# Altium PCB EIGHT_29.PcbDoc
Units mm, origin at the board's own origin, x right, y up, seen from the top; angles counter-clockwise.
Board outline 30 x 100 mm, 2 copper layers (Top Layer, Bottom Layer), stack 1.036 mm thick; 126 components, 109 nets, 375 pads, 86 vias.
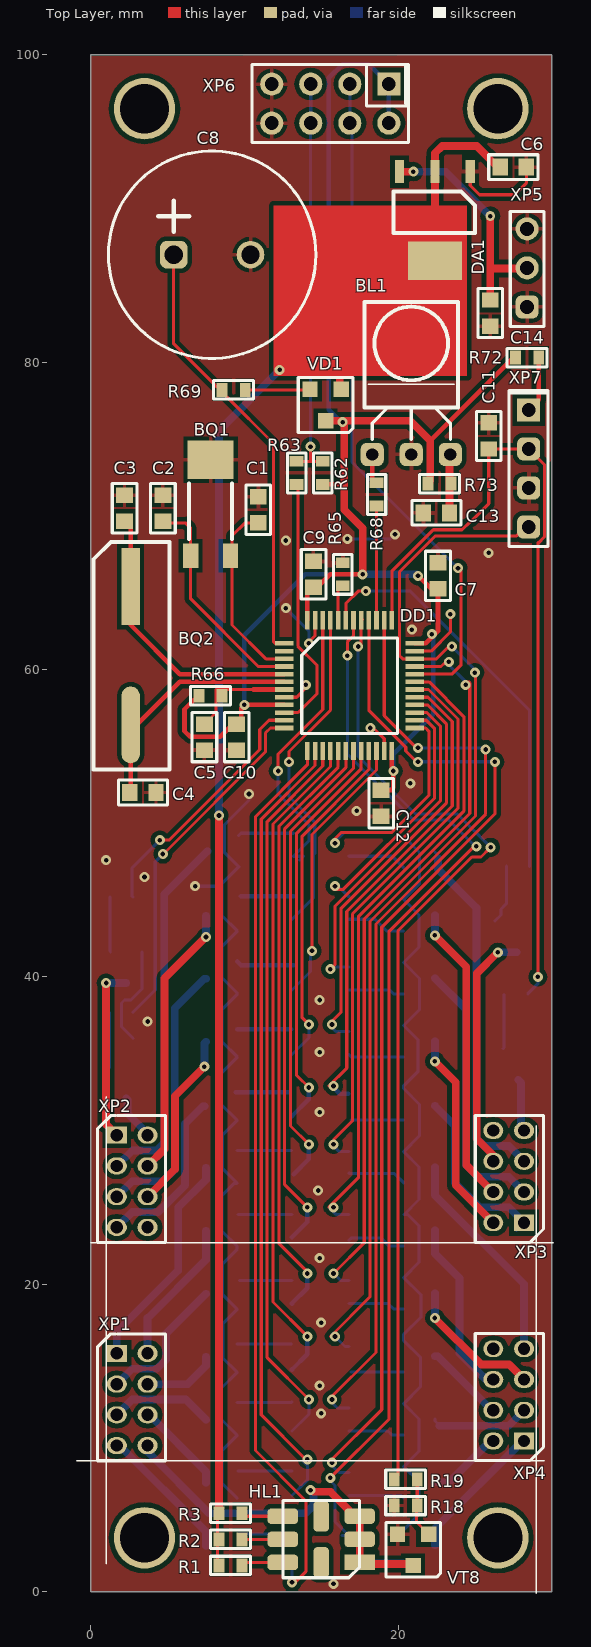
[diagram p0: Top Layer view]
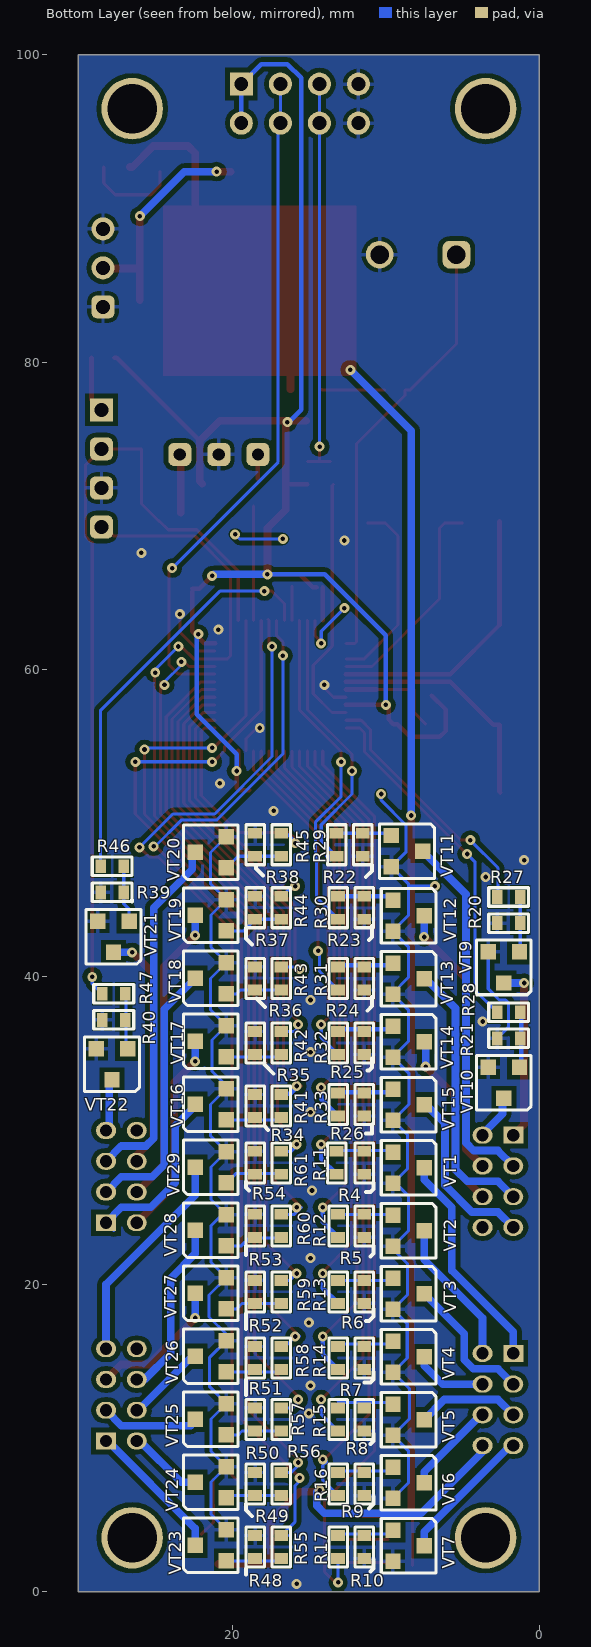
[diagram p1: Bottom Layer view, seen from below]

## Layer stack, top to bottom
Top Solder: solder mask 0.0102, Solder Resist, Dk 3.5
Top Layer: signal copper 0.018
Dielectric1: core 1, FR-4, Dk 4.8
Bottom Layer: signal copper 0.018
Bottom Solder: solder mask 0.0102, Solder Resist, Dk 3.5

## Board outline
0,0 0,100 30,100 30,0

## Design rules (kind name [scope] priority, off if disabled: settings)
Clearance Clearance_1 [IsRegion] p1: gap=0.3
Clearance [All] p2: gap=0.18
HoleSize HoleSize_1 [All] p1: absolutevalues=TRUE maxlimit=44 minlimit=0.025 maxpercent=80.000 minpercent=20.000
HoleSize [All] p2: absolutevalues=TRUE maxlimit=2.54 minlimit=0.025 maxpercent=80.000 minpercent=20.000
MinimumSolderMaskSliver [All] p1: minsoldermaskwidth=0
PlaneClearance [All] p1: clearance=0.3
PlaneConnect [All] p1: planeconnectstyle=Direct reliefexpansion=0.508 reliefentries=4 reliefconductorwidth=0.2 reliefairgap=0.2
PolygonConnect PolygonConnect_isVia [isVia] p1: connectstyle=Direct reliefconductorwidth=0.254 reliefentries=4 polygonreliefangle="90 Angle" airgapwidth=0.254
PolygonConnect [All] p2: connectstyle=Relief reliefconductorwidth=0.254 reliefentries=4 polygonreliefangle="90 Angle" airgapwidth=0.254
RoomDefinition EIGHT_29 [InComponentClass('EIGHT_29')] p1: confinementstyle=ConfineIn formatcopy=TRUE lockcomponents=FALSE outline -14,-7.2 177.7,-7.2 177.7,100.4 -14,100.4
RoutingVias [All] p1: holewidth=0.3 width=0.65 viastyle="Through Hole" minholewidth=0.3 minwidth=0.65 maxholewidth=100 maxwidth=100
SilkToSilkClearance SilkToSilkClearance_1 [All] p1: silktosilkclearance=0
SilkToSilkClearance [All] p2: silktosilkclearance=0
SilkToSolderMaskClearance [IsPad] p1: minsilkscreentomaskgap=0 clearancetoexposedcopper=TRUE
SolderMaskExpansion [All] p1: expansion=0.1
Width Width_1 [All] p1: maxlimit=0.5 minlimit=0.1 preferedwidth=0.2 minimp=50.000000 maximp=50.000000 favimp=50.000000
Width [All] p2: maxlimit=5 minlimit=0.2 preferedwidth=0.2
23 further rules are at their usual default settings.

## Components (designator, comment, footprint, x,y, rotation, side; value= is the part's Value field where it differs from the comment)
BL1 "TSOP34836" "TSOP348xx -landed" 23.4,74 r270 top
BQ1 "MS1V-T1K" Quartz32k 9.1,67.4 r270 top
BQ2 "8,000M" "HC 49SM" 2.6,65.4 r270 top
C1 "20" Cap_0805 10.9,70.4 r90 top
C2 "20" Cap_0805 4.7,70.5 r90 top
C3 "20" Cap_0805 2.2,70.5 r90 top
C4 "20" Cap_0805 3.4,52 r0 top
C5 "0,01uF" Cap_0805 7.4,55.6 r90 top
C6 "4,7uF" Cap_0805 27.5,92.7 r180 top
C7 "0.1uF" CAP_0805 22.6,66.1 r270 top
C8 "EECF5R5U224" EECF5R5U224 5.4,87 r0 top
C9 "0.1uF" CAP_0805 14.5,66.2 r270 top
C10 "0.1uF" CAP_0805 9.5,55.6 r90 top
C11 "100" Cap_0805 25.9,75.2 r270 top
C12 "0.1uF" CAP_0805 18.9,51.3 r90 top
C13 "4,7uF" Cap_0805 22.5,70.2 r0 top
C14 "0.1uF" CAP_0805 26,83.2 r90 top
DA1 "TLV1117 3.6" SOT223 22.7,89.9 r90 top
DD1 "STM32F100C8T6B" LQFP48 12.6,61.7 r0 top
HL1 "LED" LED5050 14.5,5.4 r0 top
R1 "100" Res_0603 9.1,1.7 r180 top net-tie
R2 "100" Res_0603 9.1,3.4 r180 top net-tie
R3 "100" Res_0603 9.1,5.1 r180 top net-tie
R4 "100k" Res_0603 11.4,27.9 r270 bottom net-tie
R5 "100k" Res_0603 11.4,23.8 r270 bottom net-tie
R6 "100k" Res_0603 11.4,19.5 r270 bottom net-tie
R7 "100k" Res_0603 11.4,15.2 r270 bottom net-tie
R8 "100k" Res_0603 11.4,11.2 r270 bottom net-tie
R9 "100k" Res_0603 11.4,7 r270 bottom net-tie
R10 "100k" Res_0603 11.4,2.9 r270 bottom net-tie
R11 "5.1k" Res_0603 13.2,27.9 r90 bottom net-tie
R12 "5.1k" Res_0603 13.1,23.8 r90 bottom net-tie
R13 "5.1k" Res_0603 13.1,19.5 r90 bottom net-tie
R14 "5.1k" Res_0603 13.1,15.2 r90 bottom net-tie
R15 "5.1k" Res_0603 13.1,11.2 r90 bottom net-tie
R16 "5.1k" Res_0603 13.1,7 r90 bottom net-tie
R17 "5.1k" Res_0603 13.1,2.9 r90 bottom net-tie
R18 "100k" Res_0603 20.5,5.6 r180 top net-tie
R19 "5.1k" Res_0603 20.5,7.3 r0 top net-tie
R20 "100k" Res_0603 2,43.5 r0 bottom net-tie
R21 "100k" Res_0603 2,36 r0 bottom net-tie
R22 "100k" Res_0603 11.5,48.6 r270 bottom net-tie
R23 "100k" Res_0603 11.4,44.5 r270 bottom net-tie
R24 "100k" Res_0603 11.4,39.9 r270 bottom net-tie
R25 "100k" Res_0603 11.4,35.7 r270 bottom net-tie
R26 "100k" Res_0603 11.4,31.7 r270 bottom net-tie
R27 "5.1k" Res_0603 2,45.2 r180 bottom net-tie
R28 "5.1k" Res_0603 2,37.7 r180 bottom net-tie
R29 "5.1k" Res_0603 13.2,48.6 r270 bottom net-tie
R30 "5.1k" Res_0603 13.1,44.5 r270 bottom net-tie
R31 "5.1k" Res_0603 13.1,39.9 r270 bottom net-tie
R32 "5.1k" Res_0603 13.1,35.7 r270 bottom net-tie
R33 "5.1k" Res_0603 13.1,31.7 r270 bottom net-tie
R34 "100k" Res_0603 18.5,31.6 r90 bottom net-tie
R35 "100k" Res_0603 18.5,35.7 r90 bottom net-tie
R36 "100k" Res_0603 18.5,39.9 r90 bottom net-tie
R37 "100k" Res_0603 18.5,44.5 r90 bottom net-tie
R38 "100k" Res_0603 18.5,48.6 r90 bottom net-tie
R39 "100k" Res_0603 27.8,45.5 r0 bottom net-tie
R40 "100k" Res_0603 27.7,37.2 r0 bottom net-tie
R41 "5.1k" Res_0603 16.8,31.6 r270 bottom net-tie
R42 "5.1k" Res_0603 16.8,35.7 r270 bottom net-tie
R43 "5.1k" Res_0603 16.8,39.9 r270 bottom net-tie
R44 "5.1k" Res_0603 16.8,44.5 r270 bottom net-tie
R45 "5.1k" Res_0603 16.8,48.6 r270 bottom net-tie
R46 "5.1k" Res_0603 27.8,47.2 r180 bottom net-tie
R47 "5.1k" Res_0603 27.7,38.9 r180 bottom net-tie
R48 "100k" Res_0603 18.5,2.9 r90 bottom net-tie
R49 "100k" Res_0603 18.5,7 r90 bottom net-tie
R50 "100k" Res_0603 18.5,11.2 r90 bottom net-tie
R51 "100k" Res_0603 18.5,15.2 r90 bottom net-tie
R52 "100k" Res_0603 18.5,19.5 r90 bottom net-tie
R53 "100k" Res_0603 18.5,23.8 r90 bottom net-tie
R54 "100k" Res_0603 18.5,27.9 r90 bottom net-tie
R55 "5.1k" Res_0603 16.8,2.9 r270 bottom net-tie
R56 "5.1k" Res_0603 16.8,7 r270 bottom net-tie
R57 "5.1k" Res_0603 16.8,11.2 r270 bottom net-tie
R58 "5.1k" Res_0603 16.8,15.2 r270 bottom net-tie
R59 "5.1k" Res_0603 16.8,19.5 r270 bottom net-tie
R60 "5.1k" Res_0603 16.8,23.8 r270 bottom net-tie
R61 "5.1k" Res_0603 16.8,27.9 r270 bottom net-tie
R62 "5.1k" Res_0603 15.1,72.8 r90 top net-tie
R63 "1k" Res_0603 13.4,72.8 r270 top net-tie
R65 "10k" Res_0603 16.4,66.2 r90 top net-tie
R66 "10k" Res_0603 7.8,58.3 r0 top net-tie
R68 "1k" Res_0603 18.6,71.4 r90 top net-tie
R69 "100" Res_0603 9.3,78.2 r180 top net-tie
R72 "100" Res_0603 28.4,80.3 r180 top net-tie
R73 "100" Res_0603 22.7,72.1 r180 top net-tie
VD1 "BAT54S" SOT-23 16.3,76.2 r180 top
VT1 "BC817" SOT-23 7.5,28.6 r270 bottom
VT2 "BC817" SOT-23 7.5,24.5 r270 bottom
VT3 "BC817" SOT-23 7.5,20.4 r270 bottom
VT4 "BC817" SOT-23 7.5,16.3 r270 bottom
VT5 "BC817" SOT-23 7.5,12.2 r270 bottom
VT6 "BC817" SOT-23 7.5,8.1 r270 bottom
VT7 "BC817" SOT-23 7.5,4 r270 bottom
VT8 "BC817" SOT-23 22,1.7 r180 top
VT9 "BC817" SOT-23 1.3,39.6 r0 bottom
VT10 "BC817" SOT-23 1.3,32.1 r0 bottom
VT11 "BC817" SOT-23 7.6,49.2 r270 bottom
VT12 "BC817" SOT-23 7.5,45 r270 bottom
VT13 "BC817" SOT-23 7.5,40.9 r270 bottom
VT14 "BC817" SOT-23 7.5,36.8 r270 bottom
VT15 "BC817" SOT-23 7.5,32.7 r270 bottom
VT16 "BC817" SOT-23 22.4,30.7 r90 bottom
VT17 "BC817" SOT-23 22.4,34.8 r90 bottom
VT18 "BC817" SOT-23 22.4,38.9 r90 bottom
VT19 "BC817" SOT-23 22.4,43 r90 bottom
VT20 "BC817" SOT-23 22.4,47.1 r90 bottom
VT21 "BC817" SOT-23 26.7,41.6 r0 bottom
VT22 "BC817" SOT-23 26.8,33.3 r0 bottom
VT23 "BC817" SOT-23 22.4,2 r90 bottom
VT24 "BC817" SOT-23 22.4,6.1 r90 bottom
VT25 "BC817" SOT-23 22.4,10.2 r90 bottom
VT26 "BC817" SOT-23 22.4,14.3 r90 bottom
VT27 "BC817" SOT-23 22.4,18.4 r90 bottom
VT28 "BC817" SOT-23 22.4,22.5 r90 bottom
VT29 "BC817" SOT-23 22.4,26.6 r90 bottom
XP1 "Conn_EIGHT8" CONN2-8 1.7,15.5 r0 top
XP2 "Conn_EIGHT8" CONN2-8 1.7,29.7 r0 top
XP3 "Conn_EIGHT8" CONN2-8 28.2,24 r180 top
XP4 "Conn_EIGHT8" CONN2-8 28.2,9.8 r180 top
XP5 "" CONN_2.54_3 28.4,83.6 r180 top
XP6 "Connect_2.54_8_2" LEGS8 19.4,98.1 r270 top
XP7 "SWD" CONN_2.54_4 28.5,76.9 r0 top

## Footprints (in the part's own frame and the unit in brackets; to place one, negate y for a bottom-side part, rotate by r counter-clockwise, add the part's x,y. Pads: shape width x height; smd on the part's side, far side on the other; paste and mask are expansions set on the pad)
Cap_0805 [mm]
  rect 1x1.1 smd: 1(-0.85,0) 2(0.85,0)
  silkscreen extent -1.6,-0.8 1.6,0.8
CAP_0805 [mm]
  rect 1x1.1 smd: 1(-0.85,0) 2(0.85,0)
  silkscreen extent -1.6,-0.8 1.6,0.8
CONN2-8 [mm] "BH2-8"
  rect 1.3x1.1 hole 0.8: 1(0,0)
  oval 1.3x1.1 hole 0.8: 2(2,0) 3(0,-2) 4(2,-2) 5(0,-4) 6(2,-4) 7(0,-6) 8(2,-6)
  silkscreen extent -1.27,-6.98 3.17,1.27
CONN_2.54_3 [mm]
  rrect50% 1.5x1.5 hole 0.9: 1(0,0)
  round 1.5 hole 0.9: 2(0,-2.54) 3(0,-5.08)
  silkscreen extent -1.1,-6.2 1.1,1.27
CONN_2.54_4 [mm]
  rect 1.5x1.5 hole 0.9: 1(0,0)
  rrect50% 1.5x1.5 hole 0.9: 2(0,-2.54) 3(0,-5.08) 4(0,-7.62)
  silkscreen extent -1.27,-8.89 1.27,1.27
EECF5R5U224 [mm] "EECF5R5U224 ultracapacitor"
  rrect50% 1.8x1.8 hole 1.2: 1(0,0)
  round 1.8 hole 1.2: 2(5,0)
  silkscreen extent -4.25,-6.75 9.25,6.75
"HC 49SM" [mm]
  rect 5x1.2 smd: 1(0,0)
  oval 5x1.2 smd: 2(9,0)
  silkscreen extent -2.9,-2.41 11.9,2.54
LED5050 [mm] "LED5050"
  rect 2x1 smd: 1(3,-3.5)
  rrect50% 2x1 smd: 2(3,-2) 3(3,-0.5) 4(-2,-0.5) 5(-2,-2) 6(-2,-3.5)
  rrect50% 1x2 smd: 7(0.5,-0.5) 8(0.5,-3.5)
  silkscreen extent -2,-4.5 3,0.54
LEGS8 [mm]
  rect 1.5x1.5 hole 0.9: 1(0,0)
  round 1.5 hole 0.9: 2(2.54,0) 3(0,-2.54) 4(2.54,-2.54) 5(0,-5.08) 6(2.54,-5.08) 7(0,-7.62) 8(2.54,-7.62)
  silkscreen extent -1.27,-8.9 3.81,1.27
LQFP48 [mm]
  rect 1.2x0.3 smd: 1(0,0) 2(0,-0.5) 3(0,-1) 4(0,-1.5) 5(0,-2) 6(0,-2.5) 7(0,-3) 8(0,-3.5) 9(0,-4) 10(0,-4.5) 11(0,-5) 12(0,-5.5) 25(8.5,-5.5) 26(8.5,-5) 27(8.5,-4.5) 28(8.5,-4) 29(8.5,-3.5) 30(8.5,-3) 31(8.5,-2.5) 32(8.5,-2) 33(8.5,-1.5) 34(8.5,-1) 35(8.5,-0.5) 36(8.5,0)
  rect 0.3x1.2 smd: 13(1.5,-7) 14(2,-7) 15(2.5,-7) 16(3,-7) 17(3.5,-7) 18(4,-7) 19(4.5,-7) 20(5,-7) 21(5.5,-7) 22(6,-7) 23(6.5,-7) 24(7,-7) 37(7,1.5) 38(6.5,1.5) 39(6,1.5) 40(5.5,1.5) 41(5,1.5) 42(4.5,1.5) 43(4,1.5) 44(3.5,1.5) 45(3,1.5) 46(2.5,1.5) 47(2,1.5) 48(1.5,1.5)
  silkscreen extent 1.13,-5.86 7.36,0.37
Quartz32k [mm] "Resonator 32kHz"
  rect 1.6x1 smd: 1(0,0) 2(0,-2.6)
  rect 2.5x3 smd: 3(-6.25,-1.3)
  silkscreen extent -4.7,-2.7 -1.1,0.1
Res_0603 [mm] "0603"
  rect 0.7x0.9 smd: 1(-0.75,0) 2(0.75,0)
  silkscreen extent -1.3,-0.6 1.3,0.6
SOT223 [mm] "SOT223"
  rect 1.5x0.6 smd: 1(2.5,-2) 2(2.5,0.3) 3(2.5,2.6)
  rect 2.5x3.5 smd: 4(-3.3,0.3)
  silkscreen extent -1.5,-2.3 1.2,3
SOT-23 [mm]
  rect 1x1 smd: 1(0,-2.032) 2(2.032,-2.032) 3(1.016,0)
  silkscreen extent -0.76,-2.79 2.79,0.76
"TSOP348xx -landed" [mm]
  rrect50% 1.5x1.5 hole 0.8: 1(0,-5.08) 2(0,-2.54) 3(0,0)
  silkscreen extent -9.91,-5.59 -0.98,0.51

## Part data
BL1: library part TSOP348xx_landed, "IR Receiver module"
BQ1: "MS1V-T1K Quartz 32kHz 6pF"
BQ2: library part "BQ_HC 49SM", "Crystal oscillator"
C1 C2 C3 C4: library part Cap_0805, "20pF 100V 5% NPO"
C5: library part Cap_0805, "0805 0.01uF 10V X7R 10%"
C6 C13: library part Cap_0805, "4.7uF 16V X7R 10%"
C7 C9 C10 C12 C14: library part Cap_0805
C11: library part Cap_0805, "0805 100pF 50V X7R 10%"
DA1: library part TLV1117, "TLV1117-sot223"
DD1: "ARM Cortex-M3 MCU"
HL1: library part "LED SMD5050", "SMD5050"
R1 R2 R3 R69 R72 R73: library part Res_0805, "0805 0.125W 100 Ohms 5%"
R4 R5 R6 R7 R8 R9 R10 R18 R20 R21 R22 R23 R24 R25 R26 R34 R35 R36 R37 R38 R39 R40 R48 R49 R50 R51 R52 R53 R54: library part Res_0805, "0805, 0.125W, 100 kOhm, 5 %"
R11 R12 R13 R14 R15 R16 R17 R19 R27 R28 R29 R30 R31 R32 R33 R41 R42 R43 R44 R45 R46 R47 R55 R56 R57 R58 R59 R60 R61 R62: library part Res_0805, "0805, 0.125W, 5.1 kOhm, 5 %"
R63: library part Res_0805, "0805, 0.125W, 1 kOhm, 5 %"
R65 R66: library part Res_0805, "0805, 0.125W, 10 kOhm, 5 %"
R68: library part Res_0805, "0805 1k Ohm 5% 0.125W"
VT1 VT2 VT3 VT4 VT5 VT6 VT7 VT8 VT9 VT10 VT11 VT12 VT13 VT14 VT15 VT16 VT17 VT18 VT19 VT20 VT21 VT22 VT23 VT24 VT25 VT26 VT27 VT28 VT29: library part NPN_SOT23_DIG_1, "BC817 NPN"
XP5: library part CONNECT_3
XP7: library part CONNECT_SWD, "PLS-4"

## Free pads (board coordinates)
  round 4 hole 3.2: 0(3.5,3.5) 0(3.5,96.5) 0(26.5,3.5) 0(26.5,96.5)

## Via types
v1: diameter 0.65, hole 0.3, Top Layer to Bottom Layer, 86 vias

## Nets (pads, with @x,y where several pads share a name; then routed paths per layer and width w, separated by ;. In a path a pad name is that pad's centre, name@x,y a point inside that pad or via, vN(x,y) a via of type N, cw(c..) or ccw(c..) an arc to the next point about the centre after c; other vN are vias at no path point)
+3.6V: C6.2 DA1.2 DA1.4 R1.2 R2.2 R3.2 VD1.1 | length 104.5
  Top Layer w0.2: R1.2@8.25,1.7 R3.2@8.25,5.2
  Top Layer w0.5: R3.2 v1(8.35,50.5) ; VD1.1@16.2,78.232 16.2,79.5 19.7,79.5 22.4,82.2 DA1.4 DA1.2 22.4,93.6 22.87,94.07 25.13,94.07 26.5,92.7 C6.2
  Bottom Layer w0.5: v1(8.35,50.5) 8.35,75.55 v1(12.3,79.5)
EIGHT0_A: VT1.3 XP1.1 | length 14.5
  Bottom Layer w0.5: XP1.1 1.7,16.9 5.7,20.9 5.7,25 7.5,26.8 VT1.3
EIGHT0_A_DR: DD1.19 R11.1 | length 30.2
  Top Layer w0.2: v1(14.2,29.1) 13,30.3 13,49.476 17.1,53.576 DD1.19
  Bottom Layer w0.3: R11.1 14.2,28.15 v1(14.2,29.1)
EIGHT0_B: VT2.3 XP1.2 | length 9.6
  Bottom Layer w0.5: XP1.2 3.7,17.8 7.5,21.6 VT2.3
EIGHT0_B_DR: DD1.18 R12.1 | length 34.3
  Top Layer w0.2: v1(14.1,25) 12.62,26.48 12.62,49.633 16.6,53.613 DD1.18
  Bottom Layer w0.3: R12.1 14.1,24.05 v1(14.1,25)
EIGHT0_C: VT3.3 XP1.3 | length 9.2
  Bottom Layer w0.5: XP1.3 2.7,14.5 4.3,14.5 4.9,15.1 4.9,16.784 VT3.3
EIGHT0_C_DR: DD1.17 R13.1 | length 38.8
  Top Layer w0.2: v1(14.1,20.7) 14.15,20.75 12.24,22.66 12.24,49.79 16.1,53.65 DD1.17
  Bottom Layer w0.3: R13.1 14.1,19.75 v1(14.1,20.7)
EIGHT0_D: VT4.3 XP1.4 | length 4.9
  Bottom Layer w0.5: XP1.4 6.3,13.5 7.5,14.7 VT4.3
EIGHT0_D_DR: DD1.16 R14.1 | length 43.4
  Top Layer w0.2: v1@14.05,16.65 11.86,18.84 11.86,49.948 15.6,53.688 DD1.16 ; v1(14.1,16.6) v1@14.2,16.5
  Bottom Layer w0.3: R14.1 14.1,15.45 14.1,16.5 14.2,16.5 v1(14.1,16.6)
EIGHT0_DP: HL1.1 HL1.2 HL1.3 VT8.3 XP1.8 | length 24.8
  Top Layer w0.2: v1(14.3,6.6) 14.5,6.6 v1@14.5,6.5 ; HL1.1 HL1.1@17.6,1.8 ; HL1.2 HL1.2@17.5,3.8 ; VT8.3@20.884,1.8 VT8.3
  Top Layer w0.5: v1@14.5,6.5 15.6,6.5 17.2,4.9 HL1.3 HL1.2@17.5,3.8 ; HL1.1 HL1.2 ; HL1.1@17.6,1.8 VT8.3@20.884,1.8
  Bottom Layer w0.2: XP1.8@3.7,9.1 XP1.8 ; v1(14.3,6.6) 14.5,6.6 v1@14.5,6.5
  Bottom Layer w0.5: XP1.8@3.7,9.1 7.7,5.1 14,5.1 14.5,5.6 v1@14.5,6.5
EIGHT0_DP_DR: DD1.41 R19.1 | length 64.2
  Top Layer w0.2: v1(17.4,61.5) 17.6,61.7 DD1.41 DD1.41@17.67,63.27 ; R19.1 20,7.55 20,43 24.8,47.8 25.4,47.8 26,48.4 26,48.428 v1(26.028,48.428)
  Bottom Layer w0.2: v1(17.4,61.5) 17.4,54.337 21.137,50.6 23.856,50.6 v1(26.028,48.428)
EIGHT0_E: VT5.3 XP1.5 | length 6.8
  Bottom Layer w0.5: XP1.5 2.7,12.5 4.5,12.5 6.184,12.5 VT5.3
EIGHT0_E_DR: DD1.15 R15.1 | length 47.3
  Top Layer w0.2: v1(14.2,12.5) 11.48,15.22 11.48,50.105 15.1,53.725 DD1.15
  Bottom Layer w0.2: R15.1 14.2,11.55 v1(14.2,12.5)
EIGHT0_F: VT6.3 XP1.6 | length 6
  Bottom Layer w0.5: XP1.6 3.8,11.5 7.5,7.8 VT6.3
EIGHT0_F_DR: DD1.14 R16.1 | length 52.1
  Top Layer w0.2: v1(14.1,8.6) 14,8.6 11.1,11.5 11.1,50.263 14.6,53.763 DD1.14
  Bottom Layer w0.2: R16.1 13.1,6.256 14.049,7.205 14.055,7.205 14.1,7.25 14.1,8.2 13.85,8.45 v1@14.2,8.8
EIGHT0_G: VT7.3 XP1.7 | length 9
  Bottom Layer w0.2: XP1.7 XP1.7@1.9,9.5
  Bottom Layer w0.5: XP1.7@1.9,9.5 7.5,3.9 VT7.3
EIGHT0_G_DR: DD1.13 R17.1 | length 59
  Top Layer w0.2: v1@13,0.5 v1(13.1,0.6) 13.3,0.6 14,1.3 14,5.9 10.72,9.18 10.72,50.42 14.1,53.8 DD1.13
  Bottom Layer w0.2: v1(13.1,0.6) R17.1
EIGHT1_A: VT9.3 XP2.1 | length 11.5
  Top Layer w0.5: v1(1,39.6) 1,30.4 XP2.1
  Bottom Layer w0.5: v1(1,39.6) VT9.3
EIGHT1_A_DR: DD1.11 R27.1 | length 16.6
  Top Layer w0.2: v1@4.425,48.9 5.1,48.9 11,54.8 11,56.1 11.6,56.7 DD1.11
  Bottom Layer w0.2: R27.1 2.7,45.25 2.7,47.1 v1(4.5,48.9)
EIGHT1_B: VT10.3 XP2.2 | length 3
  Bottom Layer w0.5: VT10.3 2.4,32.016 2.4,31.1 3.7,29.8 XP2.2
EIGHT1_B_DR: DD1.12 R28.1 | length 23.1
  Top Layer w0.2: v1(4.7,48) 4.737,48 11.38,54.643 11.38,55.88 11.7,56.2 DD1.12
  Bottom Layer w0.2: R28.1 4.2,39.15 4.2,47.5 v1(4.7,48)
EIGHT1_C: VT11.3 XP2.3 | length 24
  Bottom Layer w0.2: XP2.3 XP2.3@1.8,27.7
  Bottom Layer w0.5: XP2.3 2.7,28.7 4.266,28.7 4.78,29.214 4.78,45.38 7.584,48.184 VT11.3
EIGHT1_C_DR: DD1.46 R29.2 | length 18.8
  Top Layer w0.2: v1(12.2,53.4) 12.2,54.5 15.1,57.4 DD1.46
  Bottom Layer w0.2: v1(12.2,53.4) 12.2,51.9 14.2,49.9 14.2,48.85 R29.2 13.85,47.85 R29.2@13.6,47.6
EIGHT1_D: VT12.3 XP2.4 | length 18
  Top Layer w0.5: XP2.4 4.8,28.8 4.8,39.9 v1(7.5,42.6)
  Bottom Layer w0.2: XP2.4 XP2.4@3.837,27.7
  Bottom Layer w0.5: v1(7.5,42.6) VT12.3
EIGHT1_D_DR: DD1.45 R30.2 | length 21.9
  Top Layer w0.2: v1(12.9,54) 12.9,54.663 15.6,57.363 DD1.45
  Bottom Layer w0.2: v1(12.9,54) 12.9,51.737 14.58,50.057 14.58,48.034 14.5,47.954 14.5,45.15 R30.2
EIGHT1_E: VT13.3 XP2.5 | length 18.5
  Bottom Layer w0.2: VT13.3@7.316,39.7 VT13.3
  Bottom Layer w0.3: XP2.5 XP2.5@1.7,26.1
  Bottom Layer w0.5: XP2.5 2.7,26.7 4.7,26.7 5.46,27.46 5.46,37.96 7.384,39.884 VT13.3
EIGHT1_E_DR: DD1.22 R31.2 | length 17.8
  Top Layer w0.2: v1@14.4,41.76 14.4,49.263 18.6,53.463 DD1.22
  Bottom Layer w0.2: R31.2 14.3,40.35 14.3,41.6 v1(14.4,41.7)
EIGHT1_F: VT14.3 XP2.6 | length 11.7
  Top Layer w0.5: XP2.6 5.48,27.48 5.48,32.24 v1(7.4,34.16)
  Bottom Layer w0.5: v1(7.4,34.16) 7.4,35.684 VT14.3
EIGHT1_F_DR: DD1.21 R32.2 | length 22.2
  Top Layer w0.2: v1(14.2,36.9) 13.76,37.34 13.76,49.161 18.1,53.501 DD1.21
  Bottom Layer w0.2: R32.2 14.2,36.05 v1(14.2,36.9)
EIGHT1_G: VT15.3 XP2.7 | length 11.5
  Bottom Layer w0.2: VT15.3@7.4,31.584 VT15.3
  Bottom Layer w0.5: XP2.7 2.7,24.7 4.4,24.7 6.14,26.44 6.14,30.44 7.284,31.584 VT15.3@7.4,31.584
EIGHT1_G_DR: DD1.20 R33.2 | length 26.9
  Top Layer w0.2: v1(14.2,32.8) 14.4,32.8 14.3,32.7 13.38,33.62 13.38,49.318 17.6,53.538 DD1.20
  Bottom Layer w0.3: R33.2 14.2,32.05 v1@14.2,32.9
EIGHT2_A: VT16.3 XP3.1 | length 11.7
  Bottom Layer w0.2: VT16.3@22.4,31.62 VT16.3 ; XP3.1@27.7,23.5 XP3.1@27.7,24
  Bottom Layer w0.5: VT16.3@22.4,31.62 23.7,30.32 23.7,26.6 25.3,25 27.2,25 XP3.1
EIGHT2_A_DR: DD1.29 R41.1 | length 31.7
  Top Layer w0.2: v1(15.8,32.9) 15.5,32.9 16.66,34.06 16.66,44.26 23.525,51.125 23.525,56.625 21.95,58.2 DD1.29
  Bottom Layer w0.3: v1@15.7,32.9 16.2,32.4 R41.1@16.75,32.4
EIGHT2_B: VT17.3 XP3.2 | length 13.4
  Top Layer w0.5: v1(22.4,34.5) 23.76,33.14 23.76,26.44 XP3.2
  Bottom Layer w0.5: v1(22.4,34.5) VT17.3
EIGHT2_B_DR: DD1.28 R42.1 | length 27.2
  Top Layer w0.2: v1(15.7,36.9) 15.5,36.9 16.28,37.68 16.28,44.443 23.145,51.308 23.145,56.467 21.912,57.7 DD1.28
  Bottom Layer w0.2: v1(15.7,36.9) 15.5,36.9 15.95,36.45 R42.1
EIGHT2_C: VT18.3 XP3.3 | length 17.5
  Bottom Layer w0.5: VT18.3 24.42,37.896 24.42,27.78 25.2,27 27.2,27 XP3.3
EIGHT2_C_DR: DD1.27 R43.1 | length 21.6
  Top Layer w0.2: v1@15.5,40.6 v1(15.6,40.5) ; v1@15.8,40.7 15.9,40.8 15.9,44.6 22.765,51.465 22.765,56.31 21.875,57.2 DD1.27
  Bottom Layer w0.2: v1@15.85,40.65 R43.1
EIGHT2_D: VT19.3 XP3.4 | length 19.6
  Top Layer w0.5: v1(22.4,42.7) 24.44,40.66 24.44,27.76 XP3.4
  Bottom Layer w0.5: v1(22.4,42.7) VT19.3
EIGHT2_D_DR: DD1.26 R44.1 | length 16.9
  Top Layer w0.2: v1@15.7,45.8 15.8,45.7 16.437,45.7 22.385,51.648 22.385,56.152 21.837,56.7 DD1.26 ; v1@15.7,45.9 v1(15.9,45.9)
  Bottom Layer w0.2: v1(15.9,45.9) 15.9,46.1 16.75,45.25 R44.1
EIGHT2_E: VT20.3 XP3.5 | length 23.9
  Bottom Layer w0.2: VT20.3 VT20.3@22.8,47.716 ; XP3.5@27.7,28 27.9,27.8 XP3.5@27.9,27.7
  Bottom Layer w0.5: VT20.3@22.6,47.716 22.6,47 25.1,44.5 25.1,29.5 25.6,29 27.2,29 XP3.5
EIGHT2_E_DR: DD1.25 R45.1 | length 14
  Top Layer w0.2: v1(15.9,48.7) 15.9,48.6 15.9,49 16.3,49.4 19.6,49.4 22.005,51.805 22.005,55.995 21.8,56.2 DD1.25
  Bottom Layer w0.2: v1@15.9,48.5 15.9,48.6 15.9,48.787 R45.1@16.475,49.362
EIGHT2_F: VT21.3 XP3.6 | length 15.8
  Top Layer w0.5: XP3.6 26.2,28.4 25.12,29.48 25.12,40.22 v1(26.5,41.6)
  Bottom Layer w0.5: v1(26.5,41.6) VT21.3
EIGHT2_F_DR: DD1.43 R46.1 | length 26.7
  Top Layer w0.2: DD1.43 16.6,64.3 17.4,65.1 v1(17.9,65.1)
  Bottom Layer w0.2: v1(17.9,65.1) 20.8,65.1 28.55,57.35 R46.1
EIGHT2_G: VT22.3 XP3.7 | length 3.5
  Bottom Layer w0.2: XP3.7@27.7,30 XP3.7@28,30.3
  Bottom Layer w0.5: VT22.3 28,33.116 XP3.7@28,30.3
EIGHT2_G_DR: C11.2 DD1.37 R47.1 XP7.2 | length 53.8
  Top Layer w0.2: DD1.37 19.6,66.4 22.3,69.1 24.163,69.1 24.723,69.66 24.76,69.66 25.9,70.8 C11.2 25.91,74.36 XP7.2 29.53,73.33 29.53,69.926 29.53,68.634 29.146,68.25 29.1,68.25 v1(29.1,40)
  Bottom Layer w0.2: R47.1 29.1,39.55 v1(29.1,40)
EIGHT3_A: VT23.3 XP4.1 | length 9.5
  Bottom Layer w0.3: XP4.1@28,9.6 XP4.1 XP4.1@28.1,9.8
  Bottom Layer w0.5: VT23.3 22.4,4.1 XP4.1@28.1,9.8
EIGHT3_A_DR: DD1.42 R55.1 | length 69.9
  Top Layer w0.2: v1(15.6,7.4) 15.5,7.3 19.4,11.2 19.4,42.937 24.963,48.5 v1(25.1,48.5) ; v1(16.7,60.9) 16.7,61.8 17.1,62.2 DD1.42
  Bottom Layer w0.2: v1(15.6,7.4) 15.5,7.3 15.9,6.9 15.9,4.55 R55.1 16.35,3.65 ; v1(16.7,60.9) 16.7,54.5 20.98,50.22 23.28,50.22 v1@25.05,48.45
EIGHT3_B: VT24.3 XP4.2 | length 4.9
  Bottom Layer w0.2: XP4.2@26,9.8 XP4.2
  Bottom Layer w0.5: VT24.3 23.316,7.116 XP4.2@26,9.8
EIGHT3_B_DR: DD1.40 R56.1 | length 67.6
  Top Layer w0.2: v1(15.7,8.4) 15.5,8.4 18.94,11.84 18.94,43.24 26.3,50.6 v1(26.3,54) ; DD1.40 18.1,57.346 20.5,54.946 20.5,54.7 21.2,54 v1@21.2,53.9
  Bottom Layer w0.2: v1(15.7,8.4) 15.5,8.4 16.15,7.75 R56.1 ; v1(21.3,54) v1(26.3,54)
EIGHT3_C: VT25.3 XP4.3 | length 6.8
  Bottom Layer w0.2: VT25.3 22.4,11.1 VT25.3@22.7,10.8 ; XP4.3@27.9,11.8 XP4.3
  Bottom Layer w0.5: VT25.3@22.7,10.8 27.2,10.8 XP4.3
EIGHT3_C_DR: DD1.38 R57.1 | length 62
  Top Layer w0.2: v1(15.7,12.5) 15.5,12.5 18.56,15.56 18.56,43.448 25.7,50.588 25.7,53.744 25.695,53.749 25.695,54.795 v1(25.7,54.8) ; DD1.38 19.1,57 v1@21.25,54.85
  Bottom Layer w0.2: v1(15.7,12.5) 15.5,12.5 16.05,11.95 R57.1 ; v1(21.3,54.9) v1@25.6,54.9
EIGHT3_D: VT26.3 XP4.4 | length 5.3
  Bottom Layer w0.5: VT26.3 22.584,15.316 26.1,11.8 XP4.4
EIGHT3_D_DR: DD1.34 R58.1 XP7.4 | length 70.9
  Top Layer w0.2: v1(15.9,16.6) 15.6,16.6 18.18,19.18 18.18,43.605 25.045,50.47 25.045,59.955 v1@25.04,59.96 ; v1(23.5,61.5) 23.3,61.5 22.5,60.7 DD1.34 20.3,60.7 20.1,60.9 20.1,66.363 22.437,68.7 27.72,68.7 XP7.4@28.3,69.28 ; v1(25,59.8) v1@25,60
  Bottom Layer w0.2: v1(15.9,16.6) 15.6,16.6 15.75,16.75 16.55,15.95 R58.1 ; v1@23.3,61.5 v1(23.5,61.5) 25,60 v1(25,59.8)
EIGHT3_E: VT27.3 XP4.5 | length 9.1
  Top Layer w0.5: v1(22.4,17.8) 25.42,14.78 27.22,14.78 XP4.5
  Bottom Layer w0.5: v1(22.4,17.8) VT27.3
EIGHT3_E_DR: DD1.33 R59.1 | length 48.4
  Top Layer w0.2: v1(15.8,20.7) 17.8,22.7 17.8,43.763 24.665,50.628 24.665,59.135 24.6,59.2 v1(24.4,59) ; DD1.33 22.8,60.2 v1@23,60.4 ; v1@23.1,60.5 23.1,60.6 23.238,60.462 23.263,60.462 v1@23.3,60.5
  Bottom Layer w0.2: v1(15.8,20.7) 16.25,20.25 R59.1 ; v1@23.1,60.5 23.1,60.6 23.238,60.462 23.263,60.462 v1@23.3,60.5 ; v1@23.2,60.4 24.5,59.1 v1(24.4,59)
  other v1: 23.3,60.5
EIGHT3_F: VT28.3 XP4.6 | length 11.6
  Bottom Layer w0.5: VT28.3 22.4,22 24,20.4 24,15.5 25.7,13.8 XP4.6
EIGHT3_F_DR: DD1.31 R60.1 | length 41.8
  Top Layer w0.2: v1(15.8,25) 15.5,25 17.42,26.92 17.42,43.92 24.285,50.785 24.285,56.939 22.024,59.2 DD1.31
  Bottom Layer w0.2: v1(15.8,25) 15.5,25 15.95,24.55 R60.1
EIGHT3_G: VT29.3 XP4.7 | length 14.2
  Bottom Layer w0.5: VT29.3 22.4,25.8 28.2,20 XP4.7
EIGHT3_G_DR: DD1.30 R61.1 | length 36
  Top Layer w0.2: v1(15.8,29.1) 15.8,29.4 17.04,30.64 17.04,44.103 23.905,50.968 23.905,56.782 21.987,58.7 DD1.30
  Bottom Layer w0.2: v1(15.8,29.1) 15.7,29.1 16.15,28.65 R61.1
GND: BL1.2 BQ1.3 C1.2 C2.2 C3.2 C4.2 C5.1 C6.1 C7.1 C8.2 C9.1 C10.1 C11.1 C12.1 C13.1 C14.1 DA1.1 DD1.8 DD1.23 DD1.35 DD1.47 R4.2 R5.2 R6.2 R7.2 R8.2 R9.2 R10.2 R18.2 R20.2 R21.2 R22.2 R23.2 R24.2 R25.2 R26.2 R34.2 R35.2 R36.2 R37.2 R38.2 R39.2 R40.2 R48.2 R49.2 R50.2 R51.2 R52.2 R53.2 R54.2 R65.2 VT1.2 VT2.2 VT3.2 VT4.2 VT5.2 VT6.2 VT7.2 VT8.2 VT9.2 VT10.2 VT11.2 VT12.2 VT13.2 VT14.2 VT15.2 VT16.2 VT17.2 VT18.2 VT19.2 VT20.2 VT21.2 VT22.2 VT23.2 VT24.2 VT25.2 VT26.2 VT27.2 VT28.2 VT29.2 XP5.1 XP5.3 XP6.7 XP6.8 XP7.3 | length 139.8
  Top Layer w0.2: DD1.8 13.4,58.2 v1@13.9,58.7 ; v1(14.2,61.7) 14.2,61.8 14.6,62.2 DD1.47 ; v1(18.2,56.2) 18.4,56.2 19.1,55.5 DD1.23 ; DD1.35 22.156,61.2 23.4,62.444 v1(23.4,63.6) ; DA1.1 24.7,91.5 25.3,90.9 27.6,90.9 28.35,91.65 C6.1
  Bottom Layer w0.2: R21.2 2,36.75 2,38.3 2.2,38.5 2.612,38.5 3.332,39.22 VT9.2 ; v1(6.8,45.9) 8.532,45.9 ; VT6.2 8.532,7.068 8.532,9.168 VT5.2 8.442,11.258 8.442,13.178 VT4.2 8.6,15.2 8.6,17.436 VT3.2 8.59,19.31 8.59,21.342 9.532,22.284 VT2.2 8.532,23.468 8.532,25.768 9.332,26.568 VT1.2 8.59,27.51 8.59,29.726 VT15.2 8.5,31.7 8.5,33.736 VT14.2 9.532,34.8 8.532,35.8 8.532,37.868 VT13.2 9.532,38.958 8.532,39.958 8.532,41.968 VT12.2 9.532,43 8.532,44 8.532,45.9 ; v1(10.3,51.9) 10.3,51.5 8.69,49.89 8.69,48.11 VT11.2 8.532,46.068 8.532,45.9 ; v1(12.7,64) 14.2,62.5 v1(14.2,61.7) ; v1(16.7,68.5) 19.5,68.5 v1(19.8,68.8) ; VT23.2 21.368,5.032 21.368,7.132 VT24.2 21.368,9.132 21.368,11.232 VT25.2 21.458,13.322 21.458,15.242 VT26.2 20.368,16.736 21.5,17.868 21.5,19.3 VT27.2 21.368,21.432 21.368,23.81 20.646,24.532 20.389,24.532 21.368,25.511 21.368,27.632 VT29.2 21.4,29.664 21.4,31.7 VT16.2 20.368,32.916 21.31,33.858 21.31,35.89 VT17.2 20.371,36.832 21.4,37.861 21.4,39.9 VT18.2 21.368,41.932 21.368,44.032 VT19.2 21.4,46.064 21.4,48.1 VT20.2
  other v1: 15.8,0.5 15,11.6 14.9,13.4 15,17.5 14.9,21.7 14.8,26.1 14.9,31.2 14.9,35.1 3.7,37.1 14.9,38.5 3.5,46.5 1,47.6 17.3,50.8 20.8,52.6 14,59 20.9,62.6 25.9,67.6 12.7,68.4
IRD_OUT: DD1.39 R68.1 | length 7.5
  Top Layer w0.2: DD1.39 R68.1
NetBL1_1: BL1.1 R68.2 | length 1.6
  Top Layer w0.3: R68.2@18.32,72.43 BL1.1
NetBL1_3: BL1.3 C13.2 R73.1 | length 3.8
  Top Layer w0.5: C13.2 23.35,73.95 BL1.3
NetBQ1_1: BQ1.1 C1.1 DD1.3 | length 12.5
  Top Layer w0.2: C1.1@11.2,69.55 10.05,69.55 9.2,68.7 9.2,62.9 11.4,60.7 DD1.3
NetBQ1_2: BQ1.2 C2.1 DD1.4 | length 14.2
  Top Layer w0.2: C2.1@5,69.55 6.15,69.55 6.5,69.2 6.5,64.6 10.9,60.2 DD1.4
NetBQ2_1: BQ2.1 C3.1 DD1.5 | length 18.1
  Top Layer w0.3: C3.1@2.6,69.65 BQ2.1 2.6,62.9 5.8,59.7 DD1.5
NetBQ2_2: BQ2.2 C4.1 DD1.6 | length 15.6
  Top Layer w0.3: C4.1 2.6,52.05 BQ2.2 3,56.4 5.8,59.2 DD1.6
NetC8_1: C8.1 DD1.1 R69.2 | length 28.8
  Top Layer w0.2: C8.1 5.4,81.2 8.4,78.2 8.75,78.2 8.75,77.85 11.895,74.705 11.895,66.199 11.9,66.194 11.9,61.8 12,61.7 DD1.1
NetC14_2: C14.2 DA1.3 XP5.2 | length 15
  Top Layer w0.5: DA1.3 v1(21,92.4) ; C14.2 26,86.1 ; v1(26,89.5) 26,86.1 ; XP5.2 28.36,86.1 26,86.1
  Bottom Layer w0.5: v1(21,92.4) 23.1,92.4 v1(26,89.5)
NetDD1_10: DD1.10 R63.2 | length 16.8
  Top Layer w0.2: DD1.10 13.5,57.2 14.72,58.42 14.72,60.28 13.48,61.52 13.48,71.97 R63.2
NetDD1_44: DD1.44 R65.1 | length 2.2
  Top Layer w0.2: DD1.44 R65.1@16.1,65.45
NetHL1_4: HL1.4 R3.1 | length 2
  Top Layer w0.2: R3.1@9.95,4.9 11.7,4.9 HL1.4@11.9,5.1
NetHL1_5: HL1.5 R2.1 | length 2.6
  Top Layer w0.2: R2.1 HL1.5
NetHL1_6: HL1.6 R1.1 | length 2.7
  Top Layer w0.2: R1.1 10.05,1.9 HL1.6
NetR4_1: R4.1 R11.2 VT1.1 | length 3.5
  Bottom Layer w0.2: VT1.1@9.532,28.7 R11.2@13.05,28.7
NetR5_1: R5.1 R12.2 VT2.1 | length 3.5
  Bottom Layer w0.2: VT2.1@9.582,24.55 R12.2
NetR6_1: R6.1 R13.2 VT3.1 | length 3.4
  Bottom Layer w0.2: VT3.1@9.682,20.25 R6.1 R13.2
NetR7_1: R7.1 R14.2 VT4.1 | length 3.5
  Bottom Layer w0.2: VT4.1@9.532,16.1 R14.2@13.05,16.1
NetR8_1: R8.1 R15.2 VT5.1 | length 3.6
  Bottom Layer w0.2: VT5.1@9.532,12.3 13.05,12.3 13.1,12.35
NetR9_1: R9.1 R16.2 VT6.1 | length 3.5
  Bottom Layer w0.2: VT6.1@9.582,7.85 R16.2@13.1,7.85
NetR10_1: R10.1 R17.2 VT7.1 | length 3.5
  Bottom Layer w0.2: VT7.1@9.582,3.75 R17.2@13.1,3.75
NetR18_1: R18.1 R19.2 VT8.1 | length 3.9
  Top Layer w0.2: R18.1@21.2,5.65 21.2,4.532 VT8.1 ; R18.1 R19.2
NetR20_1: R20.1 R27.2 VT9.1 | length 3.6
  Bottom Layer w0.2: R27.2 1.25,41.682 VT9.1
NetR21_1: R21.1 R28.2 VT10.1 | length 3.5
  Bottom Layer w0.3: VT10.1@1.184,34.132 R28.2@1.184,37.65
NetR22_1: R22.1 R29.1 VT11.1 | length 3.6
  Bottom Layer w0.2: VT11.1 9.782,49.35 R22.1 R29.1
NetR23_1: R23.1 R30.1 VT12.1 | length 3.4
  Bottom Layer w0.3: VT12.1@9.782,45.25 11.5,45.25 R30.1@13.2,45.25
NetR24_1: R24.1 R31.1 VT13.1 | length 3.8
  Bottom Layer w0.3: VT13.1@9.532,41 9.782,40.75 11.5,40.75 R31.1@13.2,40.75
NetR25_1: R25.1 R32.1 VT14.1 | length 3.5
  Bottom Layer w0.3: VT14.1@9.532,36.6 R32.1@13.05,36.6
NetR26_1: R26.1 R33.1 VT15.1 | length 3.4
  Bottom Layer w0.3: VT15.1@9.432,32.5 R33.1@12.85,32.5
NetR34_1: R34.1 R41.2 VT16.1 | length 3.4
  Bottom Layer w0.2: R41.2@16.95,30.7 VT16.1
NetR35_1: R35.1 R42.2 VT17.1 | length 3.6
  Bottom Layer w0.2: R42.2 16.95,34.8 VT17.1
NetR36_1: R36.1 R43.2 VT18.1 | length 3.7
  Bottom Layer w0.2: R43.2 R36.1 19.45,39.15 19.7,38.9 VT18.1
NetR37_1: R37.1 R44.2 VT19.1 | length 3.9
  Bottom Layer w0.2: R44.2 R37.1 19.25,43 VT19.1
NetR38_1: R38.1 R45.2 VT20.1 | length 3.9
  Bottom Layer w0.2: R45.2 R38.1 19.618,47.85 VT20.1
NetR39_1: R39.1 R46.2 VT21.1 | length 3.9
  Bottom Layer w0.2: VT21.1@26.3,43.632 26.7,44.032 26.7,44.4 27.05,44.75 R39.1 R46.2
NetR40_1: R40.1 R47.2 VT22.1 | length 3.5
  Bottom Layer w0.2: VT22.1@26.832,35.332 26.9,35.4 R47.2@26.9,38.85
NetR48_1: R48.1 R55.2 VT23.1 | length 3.4
  Bottom Layer w0.2: R55.2@16.95,2 VT23.1
NetR49_1: R49.1 R56.2 VT24.1 | length 3.6
  Bottom Layer w0.2: R56.2 20.218,6.25 VT24.1
NetR50_1: R50.1 R57.2 VT25.1 | length 3.7
  Bottom Layer w0.2: R57.2 R50.1 19.35,10.45 19.6,10.2 VT25.1
NetR51_1: R51.1 R58.2 VT26.1 | length 3.4
  Bottom Layer w0.2: R58.2@16.95,14.3 VT26.1
NetR52_1: R52.1 R59.2 VT27.1 | length 3.7
  Bottom Layer w0.2: R59.2 R52.1 19.35,18.75 19.7,18.4 VT27.1
NetR53_1: R53.1 R60.2 VT28.1 | length 3.8
  Bottom Layer w0.2: R60.2@16.8,22.85 16.95,23 18.9,23 19.4,22.5 VT28.1
NetR54_1: R54.1 R61.2 VT29.1 | length 3.8
  Bottom Layer w0.2: R61.2@16.8,27.25 16.85,27.2 19.768,27.2 VT29.1
NetR69_1: R69.1 VD1.2 | length 4.1
  Top Layer w0.2: R69.1 14.136,78.2 VD1.2@14.168,78.232
NetR72_1: R72.1 XP7.1 | length 3.7
  Top Layer w0.3: XP7.1 29.15,77.55 R72.1
PPS: R62.2 R63.1 XP6.5 XP6.6 | length 26.1
  Top Layer w0.2: R63.1@13.6,73.55 14.3,73.55 ; v1(14.3,74.5) 14.3,73.55 ; R62.2 14.3,73.55
  Bottom Layer w0.2: v1(14.3,74.5) 14.3,95.54 XP6.6 XP6.5
RESETN: C5.2 DD1.7 R66.2 | length 7
  Top Layer w0.2: C5.2 8.15,57.2 8.15,58.7 10.575,58.7
  Top Layer w0.3: 10.575,58.7 DD1.7
UART_RX: DD1.32 XP6.3 XP6.4 | length 44.1
  Top Layer w0.2: DD1.32 23.5,59.7 24.105,60.305 24.105,66.395 v1(23.9,66.6)
  Bottom Layer w0.2: XP6.3 XP6.4 17.005,95.415 17.005,75.849 17,75.844 17,73.5 v1(23.9,66.6)
VCC: C7.2 C9.2 C10.2 C12.2 DD1.9 DD1.24 DD1.36 DD1.48 R62.1 R66.1 R72.2 R73.2 VD1.3 XP6.1 XP6.2 | length 113.3
  Top Layer w0.3: R66.1@7,58.3 6.1,57.4 6.1,56 6.48,55.62 8.42,55.62 9.25,56.45 C10.2 9.8,56.75 9.8,57.5 v1(10,57.7) ; v1@9.95,57.7 DD1.9 ; DD1.48 C9.2@14.1,65.35 ; C9.2 14.75,65.35 15.6,66.2 v1(17.7,66.2) ; R62.1 16.45,72.05 16.5,72.1 ; C12.2 19.55,52.15 19.7,52.3 v1(19.7,53.4) ; v1@19.6,53.4 DD1.24 ; DD1.36 21.8,61.7 22.6,62.5 C7.2@22.6,65.05 ; v1(21.3,66.1) 22.15,65.25 C7.2 ; 22.1,74.9 27.5,80.3 R72.2
  Top Layer w0.5: VD1.3@15.184,76.2 VD1.3 20.8,76.2 22.1,74.9 22.1,72.25 R73.2 ; v1@16.5,76.1 16.5,72.1 16.5,70.4 17.7,69.2 v1(17.7,66.2)
  Bottom Layer w0.3: v1(10,57.7) 10,62.226 13.974,66.2 v1(17.7,66.2) ; v1(16.4,76.1) 16.3,76.1 15.5,76.9 15.5,98.5 16.4,99.4 18.1,99.4 XP6.1 XP6.2 ; v1(19.7,53.4) 19.7,54.5 22.3,57.1 22.3,62.2 v1(22.2,62.3) ; v1@21.2,66.2 v1(21.3,66.1)
  Bottom Layer w0.5: v1(17.7,66.2) v1@21.2,66.2
pads on no net: DD1.2 HL1.7 HL1.8 XP2.8 XP3.8 XP4.8

## Polygon pours and split planes (outlines as drawn)
GND on Top Layer "Top Layer-gnd" (solid, remove dead copper, pour order 2): 0,99.899 0,0 30,0 30,100
GND on Bottom Layer "Bottom Layer-gnd" (solid, remove dead copper, pour order 4): 0,100 30,100 30,0 0,0

## Other copper
Top Layer:
  rectangle net +3.6V: 11.9,79.1 24.5,90.2

## Silkscreen, mask and mechanical layers (free items; w line width, h text height)
Top Overlay:
  lines w0.1: -0.9,8.5 29.5,8.5 ; 0,22.7 30.1,22.7 ; 1,1.8 1,32.2 ; 29,-0.1 29,30.3
Bottom Overlay:
  lines w0.254: 10.8,2.1 10.8,1.5 11,1.3 ; 10.8,6.2 10.8,5.7 11.1,5.4 ; 10.8,10.3 10.8,9.8 11,9.6 ; 10.8,14.3 10.8,13.8 11,13.6 11.4,13.6 ; 10.8,18.4 10.8,17.9 11.1,17.6 11.3,17.6 ; 10.8,22.5 10.8,22 11,21.8 ; 10.8,26.6 10.8,26.2 11,26 11.3,26 ; 10.9,30.4 10.9,29.8 11.3,29.8 ; 10.9,34.7 10.9,34.1 11.1,33.9 11.2,33.9 ; 10.9,38.7 10.9,38.1 11.2,37.8 ; 10.9,43.3 10.9,42.6 11.1,42.4 ; 10.9,47.3 10.9,46.9 11.3,46.5 ; 17.3,33.7 17.9,34.3 17.9,34.4 ; 17.65,30.05 17.9,30.3 ; 17.85,38.05 18.4,38.6 ; 18,46.6 18.45,47.05 18.45,47.3 ; 18.7,4.9 19.1,5.3 19.1,5.7 ; 18.7,42.1 19.1,42.5 19.1,43.2 ; 18.9,26.1 19.1,26.3 19.1,26.7 ; 19.1,1.1 19.1,1.5 ; 19.1,12.8 19.1,13.8 ; 19.1,17.1 19.1,18.1 ; 19.1,21.9 19.1,22.5 ; 26.5,44.9 26.5,45
Mechanical 1:
  the board outline again, w0.254